# Altium PCB DelibirdLayout.PcbDoc
Units mm, origin at the board's own origin, x right, y up, seen from the top; angles counter-clockwise.
Board outline 44.14 x 25.42 mm, 2 copper layers (Top Layer, Bottom Layer); 22 components, 18 nets, 92 pads, 14 vias.
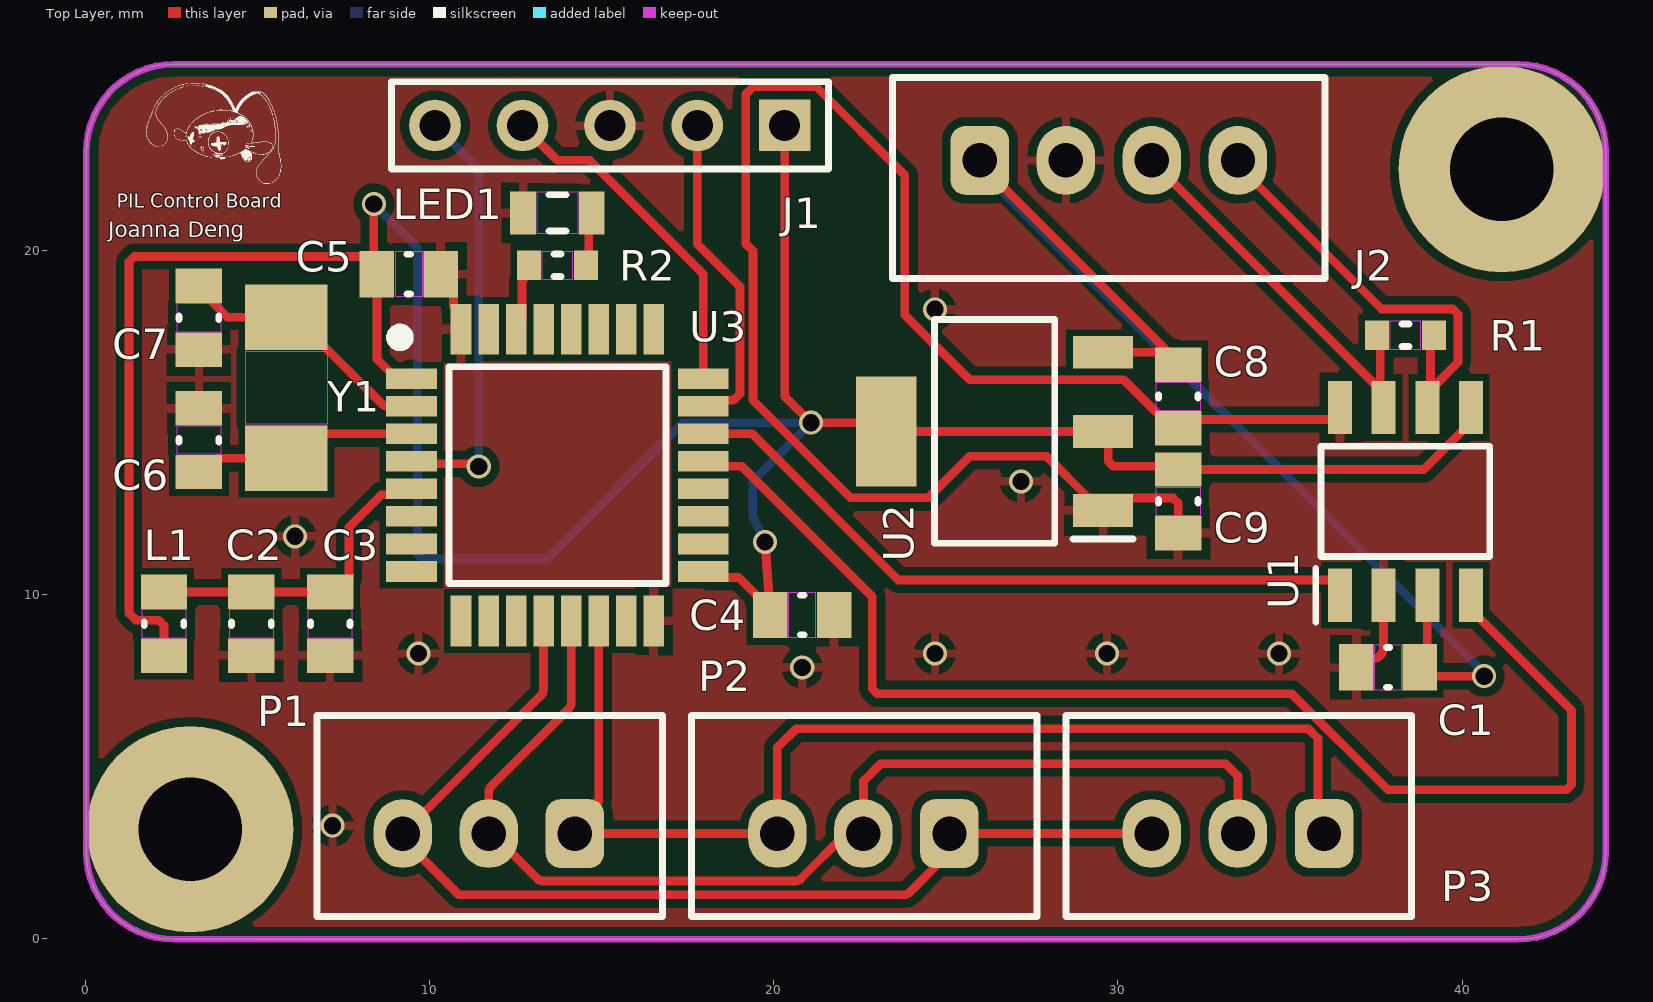
[diagram p0: Top Layer view]
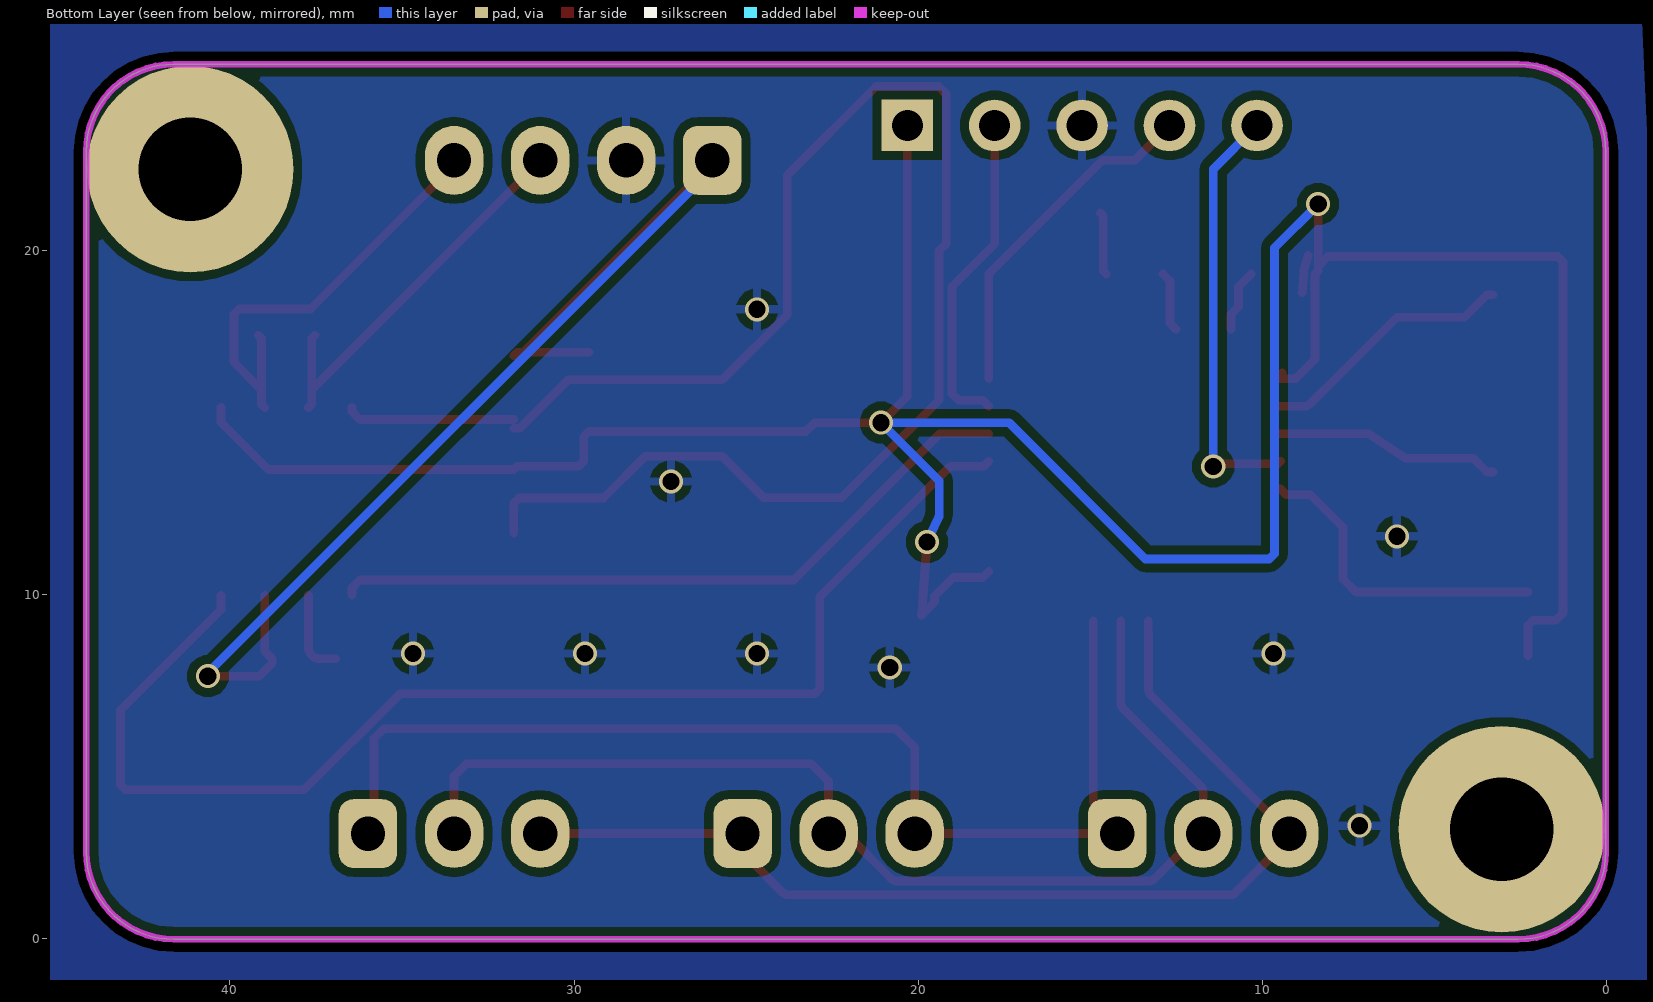
[diagram p1: Bottom Layer view, seen from below]
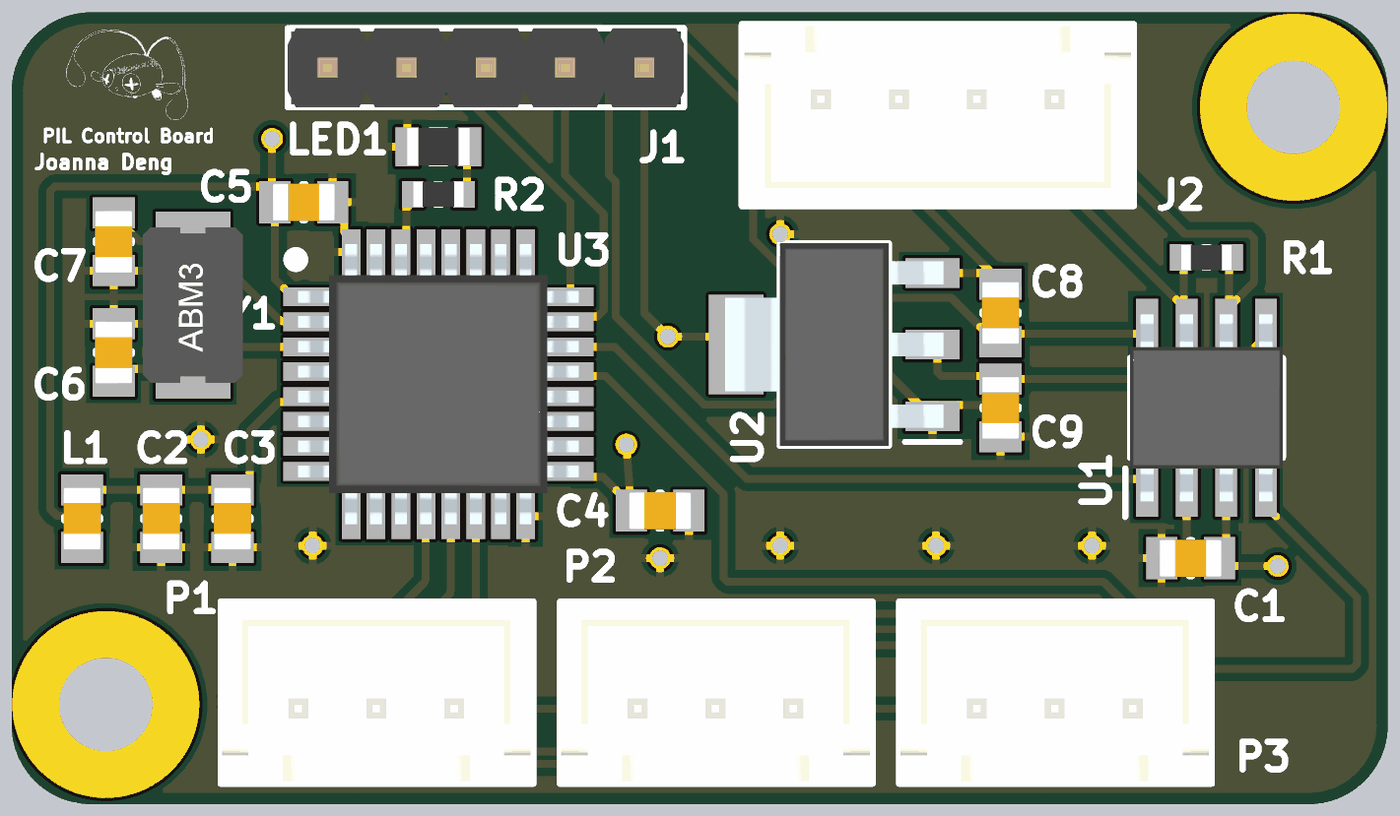
[diagram p2: 3D render of the assembled board from above, using the file's embedded part models]

## Layer stack, top to bottom
Top Solder: solder mask 0.0102, Solder Resist, Dk 3.5
Top Layer: signal copper 0.0356
Dielectric 1: dielectric 0.32, FR-4, Dk 4.8
Bottom Layer: signal copper 0.0356
Bottom Solder: solder mask 0.0102, Solder Resist, Dk 3.5

## Board outline
0.028,2.518 0.028,22.858 cw(c2.568,22.858) 2.568,25.398 41.632,25.398 cw(c41.632,22.858) 44.172,22.858 44.172,2.518 cw(c41.632,2.518) 41.632,-0.022 2.568,-0.022 cw(c2.568,2.518)

## Design rules (kind name [scope] priority, off if disabled: settings)
Clearance [All] p1: gap=0.254 ignorepadtopadclearanceinfootprint=FALSE except(0: Arc-Hole Track-Hole SMDPad-Hole THPad-Hole Via-Hole Fill-Hole Poly-Hole Region-Hole Text-Hole; 0.127: Arc-Arc Arc-Track Track-Track SMDPad-SMDPad; 0.2: Arc-SMDPad Track-SMDPad SMDPad-Fill SMDPad-Poly SMDPad-Region)
PolygonConnect [All] p1: connectstyle=Relief reliefconductorwidth=0.254 reliefentries=4 polygonreliefangle="90 Angle" airgapwidth=0.254
RoutingVias [All] p1: holewidth=0.5 width=1 viastyle="Through Hole" minholewidth=0.2 minwidth=0.6 maxholewidth=0.711 maxwidth=1.27
SilkToSolderMaskClearance [IsPad] p1: minsilkscreentomaskgap=0.15 clearancetoexposedcopper=TRUE
SolderMaskExpansion [All] p1: expansion=0.102 istentingtop=FALSE
Width [All] p1: maxlimit=0.381 minlimit=0.254 preferedwidth=0.381 toplayer_prefwidth=0.254 minimp=50.000000 maximp=50.000000 favimp=50.000000
29 further rules are at their usual default settings.

## Components (designator, comment, footprint, x,y, rotation, side; value= is the part's Value field where it differs from the comment)
C1 "Capacitor - Nonpolarized" "0805 - Capacitor" 37.846,7.874 r0 top value=100nF
C2 "Capacitor - Nonpolarized" "0805 - Capacitor" 4.826,9.144 r270 top value=10nF
C3 "Capacitor - Nonpolarized" "0805 - Capacitor" 7.112,9.144 r270 top value=1uF
C4 "Capacitor - Nonpolarized" "0805 - Capacitor" 20.828,9.398 r0 top value=100nF
C5 "Capacitor - Nonpolarized" "0805 - Capacitor" 9.398,19.304 r180 top value=100nF
C6 "Capacitor - Nonpolarized" "0805 - Capacitor" 3.302,14.478 r270 top value=27pF
C7 "Capacitor - Nonpolarized" "0805 - Capacitor" 3.302,18.034 r90 top value=27pF
C8 "Capacitor - Nonpolarized" "0805 - Capacitor" 31.75,15.748 r270 top value=10uF
C9 "Capacitor - Nonpolarized" "0805 - Capacitor" 31.75,12.7 r90 top value=10uF
J1 "1x5 Header" HDR1X5 20.32,23.622 r180 top
J2 "JST4PINXH" B4B-XH 25.988,22.606 r0 top
L1 "Inductor" "0805 - Capacitor" 2.286,9.144 r270 top value=470nH
LED1 "RED DEBUG LED" "0805 - Resistor" 13.716,21.082 r180 top
P1 "1x3 Header" B3B-XH 14.224,3.048 r180 top
P2 "1x3 Header" B3B-XH 25.106,3.048 r180 top
P3 "1x3 Header" B3B-XH 35.988,3.048 r180 top
R1 "Resistor" "0603 - Resistor" 38.354,17.526 r180 top value=120
R2 "Resistor" "0603 - Resistor" 13.716,19.558 r0 top value=120
U1 "TJA1051T_3,118" TJA1051T/3,118 38.354,12.7 r90 top
U2 "TLV1117-33IDCYR" TLV1117 26.416,14.732 r180 top
U3 "STM32F042K4T6" QFP80P900X900X160-32N 13.716,13.462 r0 top
Y1 "Oscillator" "2-SMD NO LEAD CRSYSTAL" 5.842,16.002 r90 top value=16MHz

## Footprints (in the part's own frame and the unit in brackets; to place one, negate y for a bottom-side part, rotate by r counter-clockwise, add the part's x,y. Pads: shape width x height; smd on the part's side, far side on the other; paste and mask are expansions set on the pad)
"2-SMD NO LEAD CRSYSTAL" [mm]
  rect 1.9x2.4 smd: 1(-2.05,0) 2(2.05,0)
  Top Layer keep-out region: -1.05,1.2 -1.05,-1.2 1.05,-1.2 1.05,1.2
  body extent -2.5,-1.6 2.5,1.6, height 1.3
"0603 - Resistor" [mm] "0603 Chip Resistor - IPC Medium Density"
  rect 0.7x0.85 smd: 1(-0.825,0) 2(0.825,0)
  Top Layer keep-out region: -0.45,0.4 -0.45,-0.4 0.45,-0.4 0.45,0.4
  silkscreen extent -0.1,-0.33 0.1,0.33, body extent -0.8,-0.4 0.8,0.4, height 0.45
"0805 - Capacitor" [mm] "0805 Chip Capacitor - IPC Medium Density"
  rect 1x1.35 smd: 1(-0.925,0) 2(0.925,0)
  Top Layer keep-out region: -0.4,0.65 -0.4,-0.65 0.4,-0.65 0.4,0.65
  silkscreen extent -0.05,-0.58 0.05,0.58, body extent -1,-0.6 1,0.6, height 1.2
"0805 - Resistor" [mm] "0805 Chip Resistor - IPC Medium Density"
  rect 0.75x1.25 smd: 1(-1,0) 2(1,0)
  Top Layer keep-out region: -0.6,0.6 -0.6,-0.6 0.6,-0.6 0.6,0.6
  silkscreen extent -0.25,-0.53 0.25,0.53, body extent -1,-0.6 1,0.6, height 0.5
B3B-XH [mm] "JST 3-pin connector"
  rrect50% 1.7x2 hole 1: 1(0,0)
  oval 1.7x2 hole 1: 2(2.5,0) 3(5,0)
  silkscreen extent -2.54,-3.43 7.49,2.41, body extent -2.45,-3.4 7.45,2.35, height 7
B4B-XH [mm] "JST 4-Pin"
  rrect50% 1.7x2 hole 1: 1(0,0)
  oval 1.7x2 hole 1: 2(2.5,0) 3(5,0) 4(7.5,0)
  silkscreen extent -2.54,-3.43 10.03,2.41, body extent -2.45,-3.4 9.95,2.35, height 7
HDR1X5 [mm] "Connector; Header; 5 Position"
  rect 1.5x1.5 hole 0.9: 1(0,0)
  round 1.5 hole 0.9: 2(2.54,0) 3(5.08,0) 4(7.62,0) 5(10.16,0)
  silkscreen extent -1.27,-1.27 11.43,1.27, body extent -1.27,-1.27 11.43,1.27, height 8.54
QFP80P900X900X160-32N [mm]
  rect 1.475x0.6 smd: 1(-4.238,2.8) 2(-4.238,2) 3(-4.238,1.2) 4(-4.238,0.4) 5(-4.238,-0.4) 6(-4.238,-1.2) 7(-4.238,-2) 8(-4.238,-2.8) 17(4.238,-2.8) 18(4.238,-2) 19(4.238,-1.2) 20(4.238,-0.4) 21(4.238,0.4) 22(4.238,1.2) 23(4.238,2) 24(4.238,2.8)
  rect 0.6x1.475 smd: 9(-2.8,-4.238) 10(-2,-4.238) 11(-1.2,-4.238) 12(-0.4,-4.238) 13(0.4,-4.238) 14(1.2,-4.238) 15(2,-4.238) 16(2.8,-4.238) 25(2.8,4.238) 26(2,4.238) 27(1.2,4.238) 28(0.4,4.238) 29(-0.4,4.238) 30(-1.2,4.238) 31(-2,4.238) 32(-2.8,4.238)
  silkscreen extent -4.77,-3.15 3.15,4.2, body extent -4.5,-4.5 4.5,4.5, height 1.6
TJA1051T/3,118 [mm] "SOIC127P600X175-8N"
  rect 1.55x0.7 smd: 1(-2.725,1.905) 2(-2.725,0.635) 3(-2.725,-0.635) 4(-2.725,-1.905) 5(2.725,-1.905) 6(2.725,-0.635) 7(2.725,0.635) 8(2.725,1.905)
  silkscreen extent -3.5,-2.45 1.6,2.61, body extent -3,-2.45 3,2.45, height 1.75
TLV1117 [mm] "SOT230P700X180-4N"
  rect 1.75x0.95 smd: 1(-3.15,2.3) 2(-3.15,0) 3(-3.15,-2.3)
  rect 1.75x3.2 smd: 2(3.15,0)
  silkscreen extent -4.03,-3.25 1.75,3.25, body extent -3.5,-3.25 3.5,3.25, height 1.8

## Part data
C1 C2 C3 C4 C5 C6 C7 C8 C9: "Nonpolarized Capacitor"
J1: "1x5 Pin Header"
J2: library part "1x4 Header", "1x4 Pin Header"
LED1: library part LED, "Light Emitting Diode"
P1 P2 P3: "1x3 Pin Header"
U1: "CAN Transceiver IC 4.5V-5.5V 250ns", Manufacturer=NXP, Manufacturer Part Number=TJA1051T/3,118, Supplier Part Number=568-8684-1-ND, ComponentLink1Description=Datasheet, ComponentLink1URL=http://www.nxp.com/docs/en/data-sheet/TJA1051.pdf, Datasheet=http://www.nxp.com/docs/en/data-sheet/TJA1051.pdf, Supplier=Digikey
U2: "Linear Voltage Regulator IC 3.3V 800MA SOT223-4", Manufacturer="Texas Instruments", Supplier Part Number=296-21112-1-ND, ComponentLink1Description=Datasheet, ComponentLink1URL=http://www.ti.com/lit/ds/symlink/tlv1117.pdf?HQS=TI-null-null-digikeymode-df-pf-null-wwe&ts=1590668900314, Manufacturer Part Number=TLV1117-33IDCYR, Supplier=Digikey
U3: "Microcontroller", Manufacturer_Name=STMicroelectronics, Mouser Part Number=511-STM32F042K4T6, ComponentLink1Description=Datasheet, ComponentLink1URL=https://www.mouser.com/datasheet/2/389/stm32f042c4-956225.pdf, Height=1.6mm, Manufacturer_Part_Number=STM32F042K4T6, Mouser Price/Stock=https://www.mouser.co.uk/ProductDetail/STMicroelectronics/STM32F042K4T6?qs=ClYTdQWm4hDAfZj5dd9NhA%3D%3D
Y1: "Crystal Oscillator"

## Free pads (board coordinates)
  round 6 hole 3: MOUNT2(3.048,3.175) MOUNT2(41.148,22.352)

## Via types
v1: diameter 0.7, hole 0.5, Top Layer to Bottom Layer, 14 vias

## Nets (pads, with @x,y where several pads share a name; then routed paths per layer and width w, separated by ;. In a path a pad name is that pad's centre, name@x,y a point inside that pad or via, vN(x,y) a via of type N, cw(c..) or ccw(c..) an arc to the next point about the centre after c; other vN are vias at no path point)
+3.3V: C4.1 C5.2 C9.2 J1.1 L1.2 U1.5 U2.2 U3.1 U3.17 | length 89.5
  Top Layer w0.254: L1.2 2.286,9.093 2.137,9.242 1.476,9.242 1.27,9.448 1.27,19.663 1.419,19.812 8.1,19.812 C5.2@8.382,19.53 ; v1(8.382,21.336) C5.2@8.382,19.53 ; C5.2@8.673,19.852 8.799,19.405 8.805,19.328 8.846,18.759 C5.2@8.849,18.759 ; U3.1@9.422,16.435 U3.1 9.04,16.262 8.473,16.829 C5.2 8.382,19.395 C5.2@8.382,19.53 ; U3.17 18.127,10.489 18.987,10.489 19.53,9.946 19.53,9.771 C4.1 19.862,9.946 v1(19.745,11.521) ; J1.1 20.32,15.748 v1(21.082,14.986) 23.012,14.986 23.266,14.732 29.566,14.732 29.718,14.58 29.718,13.865 29.867,13.716 31.659,13.716 C9.2 38.884,13.625 40.259,15 U1.5
  Bottom Layer w0.254: v1(8.382,21.336) 9.652,20.066 9.652,11.176 9.801,11.027 13.402,11.027 17.36,14.986 v1(21.082,14.986) 19.389,13.293 19.389,12.333 ccw(c19.643,12.334) 19.414,12.225 v1(19.745,11.521)
+5V: C1.2 C8.1 J2.1 U1.3 U2.3 | length 35.2
  Top Layer w0.254: J2.1 25.988,22.514 C8.1@31.47,17.032 ; U2.3 C8.1@31.47,17.032 ; C8.1@31.75,16.927 31.645,17.032 C8.1@31.47,17.032 ; U1.3 38.989,8.346 38.771,8.128 38.771,7.993 39.144,7.62 v1(40.64,7.62)
  Bottom Layer w0.254: J2.1 25.988,22.364 40.64,7.712 v1(40.64,7.62)
CANH: J2.3 R1.2 U1.7 | length 11.6
  Top Layer w0.254: J2.3 30.988,22.581 U1.7@37.624,15.945 ; R1.2 37.624,17.431 U1.7@37.624,15.945 ; U1.7 37.624,15.52 U1.7@37.624,15.945
CANL: J2.4 R1.1 U1.6 | length 13
  Top Layer w0.254: J2.4 33.488,22.456 37.656,18.288 39.729,18.288 39.878,18.139 39.878,16.739 U1.6@39.084,15.945 ; U1.6 39.084,15.52 U1.6@39.084,15.945 ; R1.1 39.084,17.431 U1.6@39.084,15.945
CANRX: U1.4 U3.21 | length 37.5
  Top Layer w0.254: U3.21 18.1,13.716 19.073,13.716 22.86,9.928 22.86,7.261 23.009,7.112 35.052,7.112 37.846,4.318 43.031,4.318 43.18,4.467 43.18,6.629 40.259,9.55 U1.4
CANTX: U1.1 U3.22 | length 20.6
  Top Layer w0.254: U3.22 19.374,14.662 23.622,10.414 36.226,10.414 36.449,10.191 U1.1
GND: C1.1 C2.2 C3.2 C4.2 C5.1 C6.1 C7.1 C8.2 C9.1 J1.3 J2.2 LED1.2 U1.2 U1.8 U2.1 U3.16 U3.32 | length 53
  Top Layer w0.254: C5.1 10.696,18.931 10.696,18.358 10.916,18.138 U3.32 ; J2.2@28.488,22.456 J2.2 ; C9.1 31.75,12.649 31.601,12.798 29.146,12.798 27.935,14.009 25.697,14.009 24.493,12.805 22.229,12.805 19.4,15.635 19.4,19.977 19.189,20.188 19.189,24.53 19.412,24.753 21.228,24.753 23.81,22.171 23.81,18.116 25.696,16.23 30.168,16.23 31.575,14.823 C8.2 ; C8.2@31.75,15.077 36.226,15.077 36.449,15.3 U1.8 ; C1.1@36.921,8.128 37.389,8.128 ccw(c37.389,8.458) 37.719,8.458 U1.2
  other v1: 7.182,3.278 20.828,7.874 9.682,8.278 24.682,8.278 29.682,8.278 34.682,8.278 6.096,11.684 27.182,13.278 24.682,18.278
NetC2_1: C2.1 C3.1 L1.1 U3.5 | length 9.3
  Top Layer w0.254: L1.1 C2.1 C3.1 7.287,10.069 7.66,10.442 7.66,11.944 8.605,12.889 9.305,12.889 U3.5
NetLED1_1: LED1.1 R2.2 | length 1.9
  Top Layer w0.254: R2.2@14.541,19.304 14.629,19.392 14.629,20.994 LED1.1
NetR2_1: R2.1 U3.30 | length 1.8
  Top Layer w0.254: U3.30 12.689,17.873 12.689,19.102 R2.1@12.891,19.304
NRESET: J1.5 U3.4 | length 12.4
  Top Layer w0.254: U3.4 9.551,13.789 11.357,13.789 v1(11.43,13.716)
  Bottom Layer w0.254: J1.5 11.43,22.352 v1(11.43,13.716)
OSCIN: C7.2 U3.2 Y1.2 | length 7.5
  Top Layer w0.254: C7.2@3.302,18.705 3.477,18.705 4.13,18.052 Y1.2 6.092,18.052 7.673,16.471 8.608,15.535 ccw(c8.787,15.716) 8.786,15.462 U3.2
OSCOUT: C6.2 U3.3 Y1.1 | length 6.6
  Top Layer w0.254: C6.2 3.477,13.553 3.876,13.952 Y1.1 6.915,14.662 U3.3
PWM1: P1.3 P2.1 P3.3 U3.12 | length 31.5
  Top Layer w0.254: U3.12 13.31,8.613 13.31,7.239 cw(c13.056,7.239) 13.236,7.06 9.3,3.124 cw(c9.121,3.305) 9.224,3.072 P1.3 9.224,2.898 10.852,1.27 23.771,1.27 ccw(c23.771,1.524) 23.95,1.344 24.855,2.249 ccw(c24.239,2.859) 25.106,2.859 P2.1 P3.3
PWM2: P1.2 P2.2 P3.2 U3.13 | length 33.6
  Top Layer w0.254: P1.2 11.724,4.254 cw(c11.978,4.253) 11.797,4.431 14.043,6.677 ccw(c13.862,6.855) 14.116,6.855 U3.13 ; P1.2 cw(c11.72,2.794) 11.901,2.973 13.133,1.741 ccw(c13.312,1.921) 13.311,1.667 20.612,1.667 ccw(c20.612,1.921) 20.791,1.741 22.024,2.974 cw(c22.203,2.794) P2.2@22.202,3.048 ; P2.2@22.203,3.048 P2.2 22.606,4.572 23.114,5.08 33.125,5.08 33.488,4.717 P3.2
PWM3: P1.1 P2.3 P3.1 U3.14 | length 33.7
  Top Layer w0.254: U3.14 14.916,4.033 cw(c14.662,4.033) 14.842,3.854 14.297,3.31 ccw(c14.478,3.131) 14.224,3.132 P1.1 P2.3 20.106,5.548 20.654,6.096 35.529,6.096 35.814,5.811 35.814,3.222 P3.1
SWCLK: J1.4 U3.24 | length 10.1
  Top Layer w0.254: J1.4 13.709,22.613 14.647,22.613 17.954,19.306 U3.24
SWDIO: J1.2 U3.23 | length 9.5
  Top Layer w0.254: J1.2 17.78,20.175 19.019,18.936 19.019,15.827 18.827,15.635 18.127,15.635 U3.23
pads on no net: U3.6 U3.7 U3.8 U3.9 U3.10 U3.11 U3.15 U3.18 U3.19 U3.20 U3.25 U3.26 U3.27 U3.28 U3.29 U3.31
copper on no net: | length 88.1
  Bottom Layer w0.254: -67.818,-61.722 20.32,-61.722

## Polygon pours and split planes (outlines as drawn)
GND on Bottom Layer "GND_L02_P000" (solid, pour order 0): -1.016,26.67 -0.762,26.924 45.212,26.924 45.212,-3.048 43.688,-1.524 -2.286,-1.524
GND on Top Layer "GND_L01_P001" (solid, remove dead copper, pour order 1): -1.016,26.67 -0.762,26.924 45.212,26.924 45.212,-1.524 43.688,-1.524 -1.016,-1.524

## Keep-outs
Keep-Out Layer:
  the board outline again, w0.2

## Silkscreen, mask and mechanical layers (free items; w line width, h text height)
Top Overlay:
  drawing of 1017 lines, arcs and shapes, not listed
  text "PIL Control Board" at 0.914,21.234 h0.41
  text "Joanna Deng" at 0.66,20.371 h0.46